# Altium PCB DC_Switch_2.PcbDoc
Units mm, origin at the board's own origin, x right, y up, seen from the top; angles counter-clockwise.
Board outline 74.5 x 95.28 mm, 2 copper layers (Top Layer, Bottom Layer); 24 components, 104 nets, 306 pads, 93 vias.
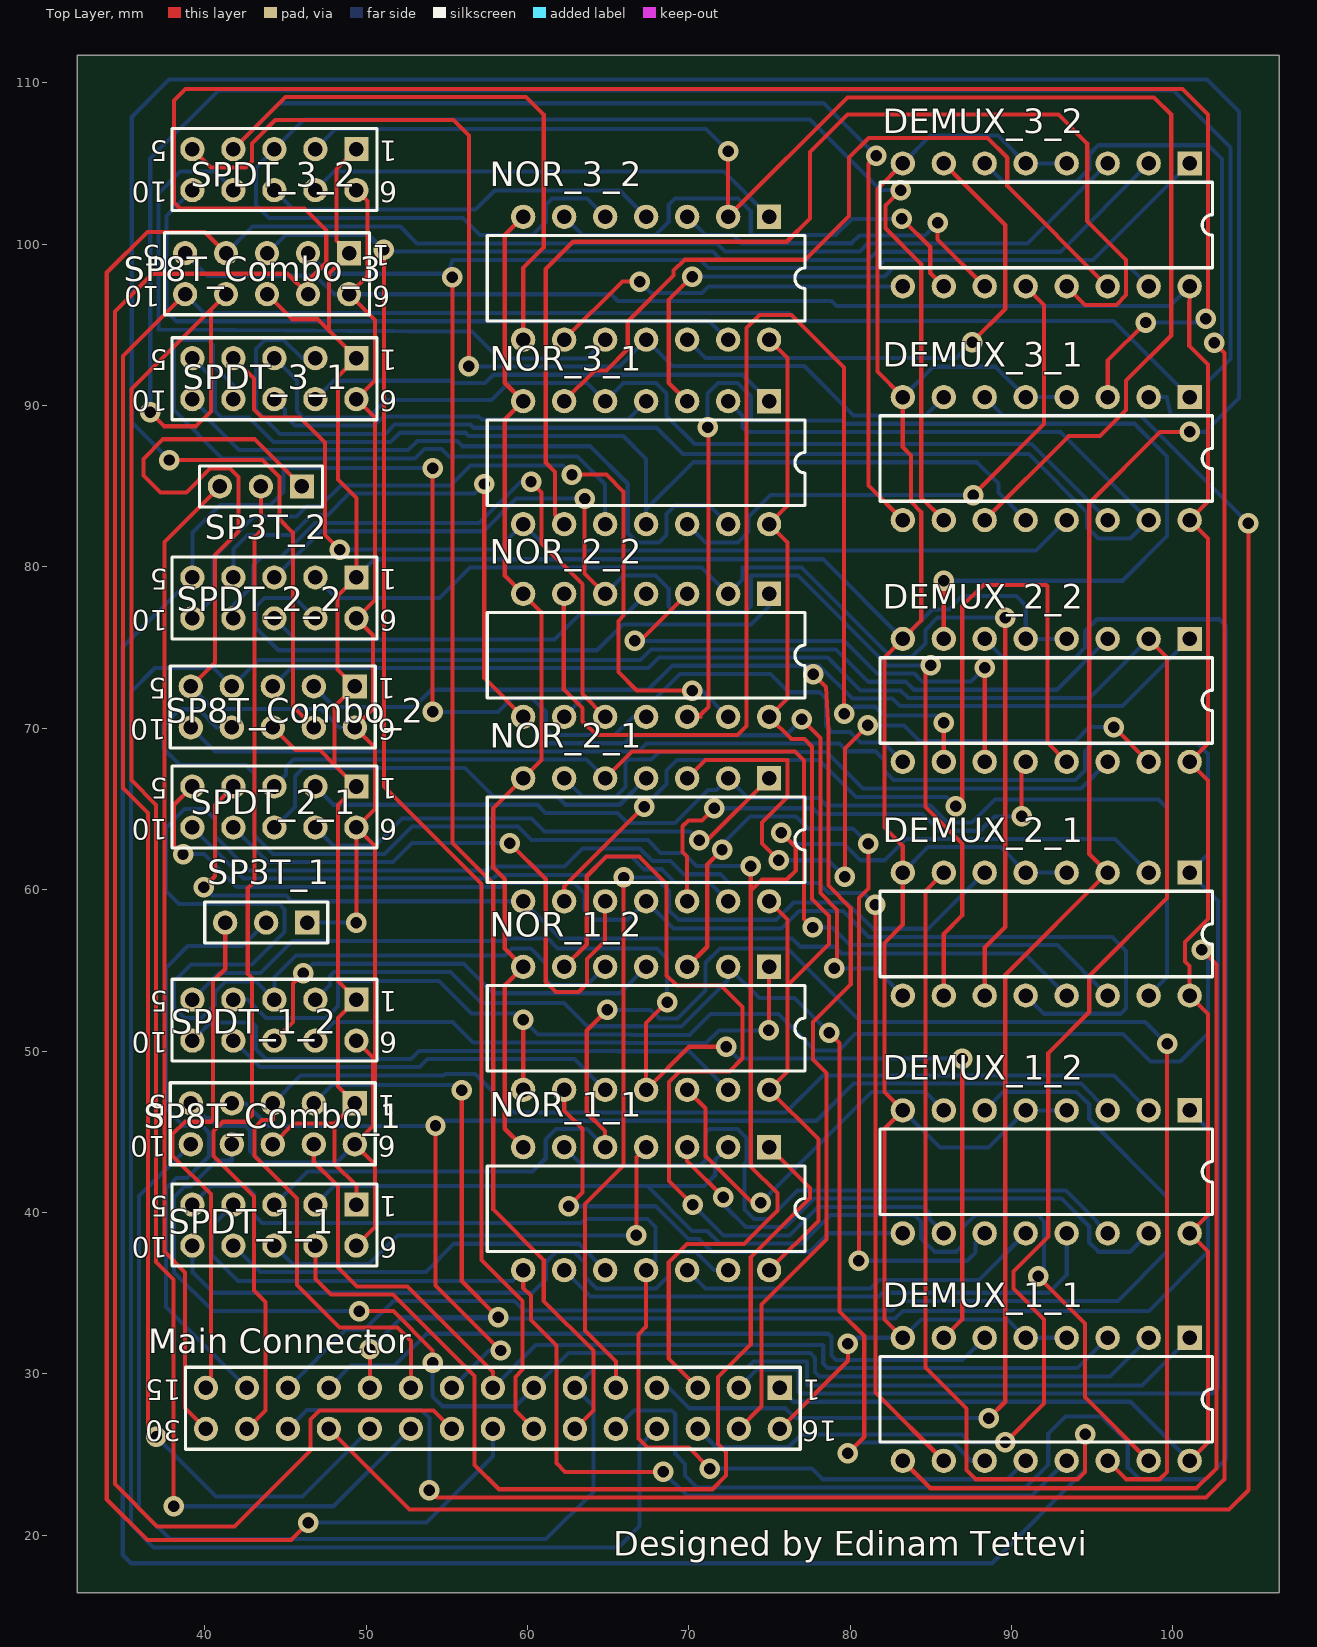
[diagram p0: Top Layer view]
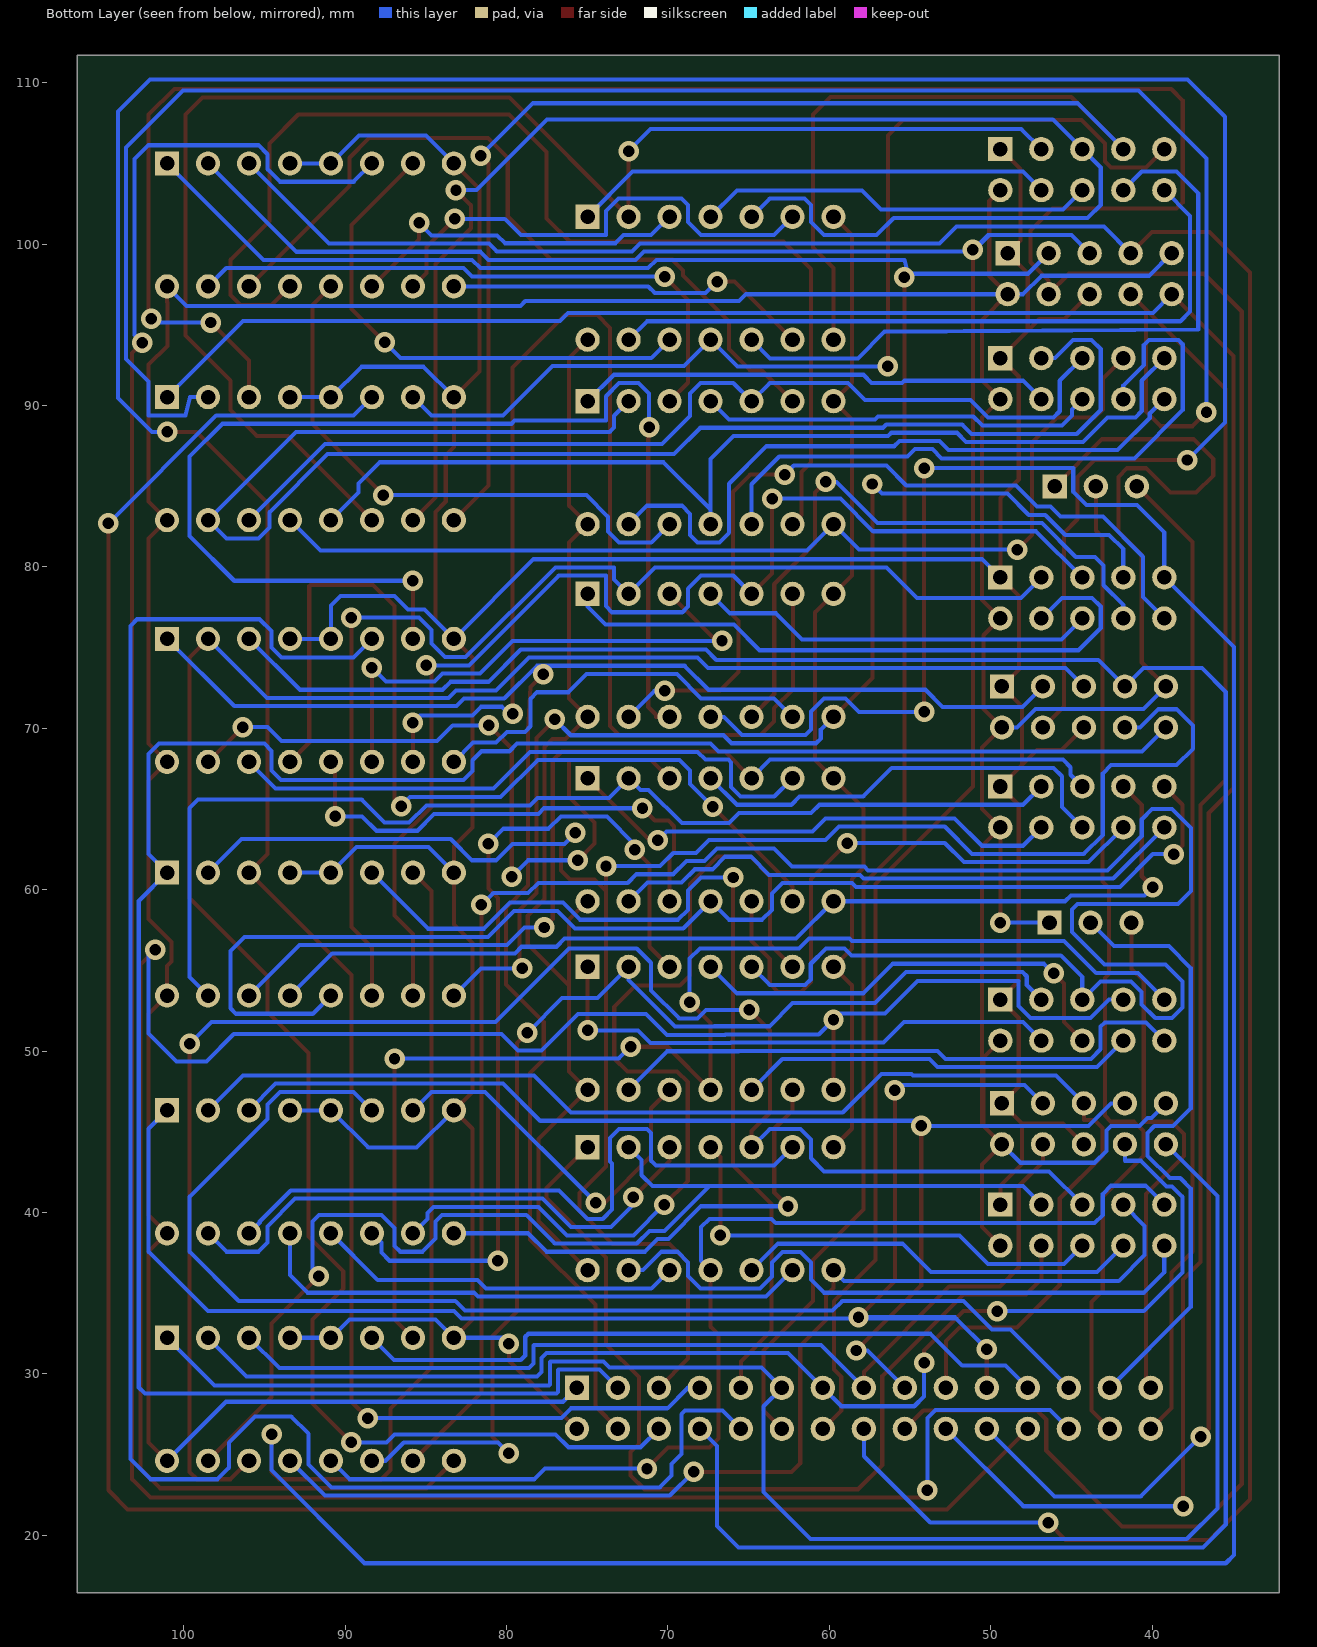
[diagram p1: Bottom Layer view, seen from below]

## Layer stack, top to bottom
Top Solder: solder mask 0.0102, Solder Resist, Dk 3.5
Top Layer: signal copper 0.0356
Dielectric 1: dielectric 0.32, FR-4, Dk 4.8
Bottom Layer: signal copper 0.0356
Bottom Solder: solder mask 0.0102, Solder Resist, Dk 3.5

## Board outline
32.106,16.434 106.604,16.434 106.604,111.709 32.106,111.709

## Design rules (kind name [scope] priority, off if disabled: settings)
Clearance [All] p1: gap=0.254
PolygonConnect [All] p1: connectstyle=Relief reliefconductorwidth=0.254 reliefentries=4 polygonreliefangle="90 Angle" airgapwidth=0.254
RoomDefinition DC_Switch_2 [InComponentClass('DC_Switch_2')] p1: confinementstyle=ConfineIn formatcopy=TRUE lockcomponents=FALSE outline 32.131,16.485 106.553,16.485 106.553,111.735 32.131,111.735
RoutingVias [All] p1: holewidth=0.711 width=1.27 viastyle="Through Hole" minholewidth=0.711 minwidth=1.27 maxholewidth=0.711 maxwidth=1.27
SolderMaskExpansion [All] p1: expansion=0.102
Width [All] p1: maxlimit=0.254 minlimit=0.254 preferedwidth=0.254
30 further rules are at their usual default settings.

## Components (designator, comment, footprint, x,y, rotation, side; value= is the part's Value field where it differs from the comment)
DEMUX_1_1 "CD54HCT238" J016D 92.151,28.423 r180 top
DEMUX_1_2 "CD54HCT238" J016D 92.151,42.52 r180 top
DEMUX_2_1 "CD54HCT238" J016D 92.151,57.252 r180 top
DEMUX_2_2 "CD54HCT238" J016D 92.151,71.73 r180 top
DEMUX_3_1 "CD54HCT238" J016D 92.151,86.716 r180 top
DEMUX_3_2 "CD54HCT238" J016D 92.151,101.194 r180 top
"Main Connector" "Arduino Pins" HDR2X15_CEN 75.641,29.134 r180 top
NOR_1_1 "SN74HC02N" N014 67.361,40.234 r180 top
NOR_1_2 "SN74HC02N" N014 67.361,51.41 r180 top
NOR_2_1 "SN74HC02N" N014 67.361,63.094 r180 top
NOR_2_2 "SN74HC02N" N014 67.361,74.524 r180 top
NOR_3_1 "SN74HC02N" N014 67.361,86.462 r180 top
NOR_3_2 "SN74HC02N" N014 67.361,97.892 r180 top
SP3T_1 "Cntrl" HDR1X3 46.355,57.963 r180 top
SP3T_2 "Cntrl" HDR1X3 46.025,84.988 r180 top
SP8T_Combo_1 "Cntrl" HDR2X5_CEN 49.301,46.761 r180 top
SP8T_Combo_2 "Cntrl" HDR2X5_CEN 49.301,72.593 r180 top
SP8T_Combo_3 "Cntrl" HDR2X5_CEN 48.946,99.441 r180 top
SPDT_1_1 "Cntrl" HDR2X5_CEN 49.403,40.488 r180 top
SPDT_1_2 "Cntrl" HDR2X5_CEN 49.403,53.188 r180 top
SPDT_2_1 "Cntrl" HDR2X5_CEN 49.403,66.396 r180 top
SPDT_2_2 "Cntrl" HDR2X5_CEN 49.403,79.35 r180 top
SPDT_3_1 "Cntrl" HDR2X5_CEN 49.403,92.939 r180 top
SPDT_3_2 "Cntrl" HDR2X5_CEN 49.403,105.893 r180 top

## Footprints (in the part's own frame and the unit in brackets; to place one, negate y for a bottom-side part, rotate by r counter-clockwise, add the part's x,y. Pads: shape width x height; smd on the part's side, far side on the other; paste and mask are expansions set on the pad)
HDR1X3 [mm] "Connector; Header; 3 Position"
  rect 1.5x1.5 hole 0.9: 1(0,0)
  round 1.5 hole 0.9: 2(2.54,0) 3(5.08,0)
  silkscreen extent -1.27,-1.27 6.35,1.27
HDR2X5_CEN [mm] "Connector; Header; 5x2 Position"
  rect 1.5x1.5 hole 0.9: 1(0,0)
  round 1.5 hole 0.9: 2(2.54,0) 3(5.08,0) 4(7.62,0) 5(10.16,0) 6(0,2.54) 7(2.54,2.54) 8(5.08,2.54) 9(7.62,2.54) 10(10.16,2.54)
  silkscreen extent -1.27,-1.27 11.43,3.81
HDR2X15_CEN [mm] "Connector; Header; 15x2 Position"
  rect 1.5x1.5 hole 0.9: 1(0,0)
  round 1.5 hole 0.9: 2(2.54,0) 3(5.08,0) 4(7.62,0) 5(10.16,0) 6(12.7,0) 7(15.24,0) 8(17.78,0) 9(20.32,0) 10(22.86,0) 11(25.4,0) 12(27.94,0) 13(30.48,0) 14(33.02,0) 15(35.56,0) 16(0,2.54) 17(2.54,2.54) 18(5.08,2.54) 19(7.62,2.54) 20(10.16,2.54) 21(12.7,2.54) 22(15.24,2.54) 23(17.78,2.54) 24(20.32,2.54) 25(22.86,2.54) 26(25.4,2.54) 27(27.94,2.54) 28(30.48,2.54) 29(33.02,2.54) 30(35.56,2.54)
  silkscreen extent -1.27,-1.27 36.83,3.81
J016D [mm] "DIP; 16 Leads; Row Spacing 7.62 mm; Pitch 2.54 mm"
  rect 1.5x1.5 hole 0.9: 1(-8.89,-3.81)
  round 1.5 hole 0.9: 2(-6.35,-3.81) 3(-3.81,-3.81) 4(-1.27,-3.81) 5(1.27,-3.81) 6(3.81,-3.81) 7(6.35,-3.81) 8(8.89,-3.81) 9(8.89,3.81) 10(6.35,3.81) 11(3.81,3.81) 12(1.27,3.81) 13(-1.27,3.81) 14(-3.81,3.81) 15(-6.35,3.81) 16(-8.89,3.81)
  silkscreen extent -10.3,-2.65 10.3,2.65
N014 [mm] "DIP; 14 Leads; Row Spacing 7.62 mm; Pitch 2.54 mm"
  rect 1.5x1.5 hole 0.9: 1(-7.62,-3.81)
  round 1.5 hole 0.9: 2(-5.08,-3.81) 3(-2.54,-3.81) 4(0,-3.81) 5(2.54,-3.81) 6(5.08,-3.81) 7(7.62,-3.81) 8(7.62,3.81) 9(5.08,3.81) 10(2.54,3.81) 11(0,3.81) 12(-2.54,3.81) 13(-5.08,3.81) 14(-7.62,3.81)
  silkscreen extent -9.85,-2.65 9.85,2.65

## Part data
DEMUX_1_1 DEMUX_1_2 DEMUX_2_1 DEMUX_2_2 DEMUX_3_1 DEMUX_3_2: library part SN54HC238J, "3-Line to 8-Line Decoder / Demultiplexer"
"Main Connector": library part "Header 15X2A", "Header, 15-Pin, Dual row"
NOR_1_1 NOR_1_2 NOR_2_1 NOR_2_2 NOR_3_1 NOR_3_2: "Quadruple 2-Input Positive-NOR Gate"
SP3T_1 SP3T_2: library part "Header 3", "Header, 3-Pin"
SP8T_Combo_1 SP8T_Combo_2 SP8T_Combo_3 SPDT_1_1 SPDT_1_2 SPDT_2_1 SPDT_2_2 SPDT_3_1 SPDT_3_2: library part "Header 5X2A", "Header, 5-Pin, Dual row"

## Via types
v1: diameter 1.27, hole 0.711, Top Layer to Bottom Layer, 93 vias

## Nets (pads, with @x,y where several pads share a name; then routed paths per layer and width w, separated by ;. In a path a pad name is that pad's centre, name@x,y a point inside that pad or via, vN(x,y) a via of type N, cw(c..) or ccw(c..) an arc to the next point about the centre after c; other vN are vias at no path point)
GND: NOR_1_1.7 NOR_1_2.7 NOR_2_1.7 NOR_2_2.7 NOR_3_1.7 NOR_3_2.7 | length 63
  Top Layer w0.254: NOR_1_1.7 58.598,45.187 58.598,54.077 NOR_1_2.7 58.598,56.363 58.598,60.65 57.887,61.362 57.887,65.049 NOR_2_1.7 60.884,68.047 60.884,77.191 NOR_2_2.7 58.598,79.477 58.598,89.129 NOR_3_1.7 58.598,91.415 58.598,100.559 NOR_3_2.7
NetDEMUX_1_1_1: "Main Connector.6" DEMUX_1_1.1 SP8T_Combo_1.10 | length 102.4
  Bottom Layer w0.254: SP8T_Combo_1.10 35.941,41.021 35.941,21.666 37.851,19.757 61.159,19.757 64.084,22.682 64.084,27.991 62.941,29.134 64.198,30.39 73.62,30.39 74.002,30.773 77.28,30.773 77.318,30.735 77.318,29.33 77.362,29.286 98.095,29.286 DEMUX_1_1.1
NetDEMUX_1_1_2: "Main Connector.7" DEMUX_1_1.2 SP8T_Combo_1.9 | length 79.1
  Top Layer w0.254: v1(49.581,33.884) 51.694,33.884 54.127,31.45 v1(54.127,30.683)
  Bottom Layer w0.254: SP8T_Combo_1.9 41.681,43.202 40.695,43.202 39.111,41.619 38.76,41.619 38.112,40.97 38.112,36.285 40.513,33.884 v1(49.581,33.884) ; v1(54.127,30.683) 54.127,28.6 54.737,27.991 59.258,27.991 60.401,29.134 62.548,31.281 77.534,31.281 77.826,30.989 77.826,30.124 78.105,29.845 96.114,29.845 DEMUX_1_1.2
NetDEMUX_1_1_3: "Main Connector.8" DEMUX_1_1.3 SP8T_Combo_1.7 | length 62.8
  Top Layer w0.254: SP8T_Combo_1.7 46.761,43.129 48.26,41.631 48.26,36.589 49.431,35.418 52.57,35.418 57.861,30.127 57.861,29.134
  Bottom Layer w0.254: 57.861,29.134 60.516,31.789 78.296,31.789 78.334,31.751 78.334,30.632 78.613,30.353 94.082,30.353 DEMUX_1_1.3
NetDEMUX_1_1_4: "Main Connector.16" DEMUX_1_1.4 DEMUX_1_1.5 DEMUX_1_1.8 DEMUX_1_2.4 DEMUX_1_2.5 DEMUX_1_2.8 DEMUX_2_1.4 DEMUX_2_1.5 DEMUX_2_1.8 DEMUX_2_2.4 DEMUX_2_2.5 DEMUX_2_2.8 DEMUX_3_1.4 DEMUX_3_1.5 DEMUX_3_1.8 DEMUX_3_2.4 DEMUX_3_2.5 DEMUX_3_2.8 SP8T_Combo_1.1 SP8T_Combo_1.8 SP8T_Combo_2.1 SP8T_Combo_2.8 SP8T_Combo_3.1 SP8T_Combo_3.8 SPDT_1_1.1 SPDT_1_2.1 SPDT_2_1.1 SPDT_2_2.1 SPDT_3_1.1 SPDT_3_2.1 | length 283.6
  Top Layer w0.254: SP8T_Combo_3.8 45.415,95.352 46.99,95.352 47.701,94.64 ; SP8T_Combo_1.8 45.517,45.517 48.057,45.517 ; SP8T_Combo_2.8 45.618,68.656 47.142,68.656 48.057,67.742 ; SPDT_1_1.1 49.403,41.656 48.057,43.002 48.057,45.517 ; SPDT_3_2.1 48.158,104.648 48.158,100.228 SP8T_Combo_3.1 47.701,98.196 47.701,94.64 ; 75.641,26.594 79.858,30.81 v1(79.858,31.877) ; DEMUX_1_1.8 82.118,33.376 82.118,45.187 DEMUX_1_2.8 82.118,47.473 82.118,56.693 83.261,57.836 DEMUX_2_1.8 83.261,62.719 82.118,63.862 82.118,74.397 DEMUX_2_2.8 84.404,76.683 84.404,83.414 83.769,84.049 83.769,86.919 83.261,87.427 DEMUX_3_1.8 81.686,92.1 81.686,103.429 DEMUX_3_2.8 ; 47.701,94.64 SPDT_3_1.1 48.26,91.796 48.26,85.42 49.403,84.277 SPDT_2_2.1 48.243,78.19 48.243,73.651 SP8T_Combo_2.1 48.057,71.349 48.057,67.742 ; 48.057,45.517 SP8T_Combo_1.1 48.26,47.803 48.26,52.045 SPDT_1_2.1 48.26,54.331 48.26,65.253 SPDT_2_1.1 48.057,67.742
  Bottom Layer w0.254: SPDT_2_2.1 50.534,80.481 78.32,80.481 DEMUX_2_2.8 85.088,77.366 86.116,77.366 86.944,78.195 90.297,78.195 90.881,77.61 DEMUX_2_2.5 DEMUX_2_2.4 ; v1(79.858,31.877) 80.213,32.233 DEMUX_1_1.8 84.404,33.376 89.738,33.376 DEMUX_1_1.5 DEMUX_1_1.4 ; DEMUX_1_2.8 85.573,44.018 88.57,44.018 DEMUX_1_2.5 DEMUX_1_2.4 ; DEMUX_2_1.8 84.836,62.636 89.306,62.636 DEMUX_2_1.5 DEMUX_2_1.4 ; DEMUX_3_1.8 85.141,92.405 89.002,92.405 DEMUX_3_1.5 DEMUX_3_1.4 ; DEMUX_3_2.8 84.988,106.731 89.154,106.731 DEMUX_3_2.5 DEMUX_3_2.4
NetDEMUX_1_1_6: "Main Connector.12" DEMUX_1_1.6 | length 43.9
  Bottom Layer w0.254: 47.701,29.134 49.073,30.505 51.765,30.505 53.74,32.481 78.658,32.481 78.842,32.297 78.842,31.14 79.121,30.861 86.97,30.861 DEMUX_1_1.6
NetDEMUX_1_1_7: DEMUX_1_1.7 NOR_1_2.11 SPDT_1_2.5 | length 78.9
  Top Layer w0.254: v1(68.656,53.035) 67.361,51.74 NOR_1_2.11 70.028,50.267 v1(72.314,50.267) ; DEMUX_1_1.7 86.944,33.376 v1(86.944,49.53)
  Bottom Layer w0.254: SPDT_1_2.5 40.882,54.827 43.461,54.827 45.454,56.82 58.598,56.82 58.75,56.972 61.265,56.972 61.874,56.363 68.021,56.363 68.656,55.728 v1(68.656,53.035) ; v1(72.314,50.267) 73.05,49.53 v1(86.944,49.53)
NetDEMUX_1_1_9: DEMUX_1_1.9 NOR_1_2.8 SPDT_1_2.4 | length 130.3
  Top Layer w0.254: NOR_1_2.8 v1(59.741,51.943) ; DEMUX_1_1.9 84.963,22.911 101.473,22.911 102.692,24.13 102.692,55.372 v1(101.778,56.286)
  Bottom Layer w0.254: SPDT_1_2.4 42.66,53.188 43.803,52.045 47.523,52.045 48.272,52.793 48.272,54.331 54.534,54.331 56.54,52.324 59.36,52.324 v1(59.741,51.943) 60.655,51.029 66.446,51.029 66.472,51.003 70.059,51.003 71.355,52.299 75.565,52.299 77.826,50.038 79.299,50.038 80.31,51.049 96.906,51.049 98.603,49.352 100.457,49.352 102.184,51.079 102.184,55.88 v1(101.778,56.286)
NetDEMUX_1_1_10: DEMUX_1_1.10 NOR_1_2.5 SPDT_1_2.3 | length 140.7
  Top Layer w0.254: v1(81.559,59.055) 81.559,28.854 DEMUX_1_1.10
  Bottom Layer w0.254: NOR_1_2.5 63.69,54.089 61.493,54.089 61.15,54.432 61.15,55.41 60.209,56.351 59.057,56.351 58.623,55.917 45.656,55.917 44.323,54.585 SPDT_1_2.3 43.192,54.319 41.3,54.319 40.652,53.67 40.652,52.895 39.802,52.045 38.76,52.045 38.112,52.693 38.112,54.319 39.156,55.363 42.942,55.363 44.958,57.379 44.958,58.776 44.628,59.106 38.402,59.106 37.592,59.915 37.592,63.83 38.76,64.999 40.005,64.999 40.64,64.364 40.64,63.322 42.762,61.201 57.594,61.201 57.824,61.431 62.302,61.431 63.424,62.553 66.962,62.553 67.742,61.773 68.859,61.773 69.672,60.96 71.958,60.96 72.492,60.427 78.029,60.427 78.664,59.792 80.823,59.792 v1(81.559,59.055)
NetDEMUX_1_1_11: DEMUX_1_1.11 NOR_1_2.2 SPDT_1_2.2 | length 74.6
  Top Layer w0.254: v1(78.715,51.13) 79.35,50.495 79.35,33.858 80.874,32.334 80.874,26.086 v1(79.858,25.07)
  Bottom Layer w0.254: SPDT_1_2.2 47.764,54.089 47.764,54.637 48.025,54.898 55.236,54.898 57.158,52.976 62.276,52.976 63.716,51.537 67.107,51.537 67.132,51.511 69.551,51.511 72.441,54.401 NOR_1_2.2 74.371,53.289 76.556,53.289 v1(78.715,51.13) ; v1(79.858,25.07) 80.531,25.744 86.372,25.744 87.503,24.613 DEMUX_1_1.11
NetDEMUX_1_1_12: DEMUX_1_1.12 NOR_1_1.11 SPDT_1_1.5 | length 70.3
  Top Layer w0.254: NOR_1_1.11 67.361,32.918 66.878,32.436 66.878,25.984 67.437,25.425 70.002,25.425 v1(71.298,24.13)
  Bottom Layer w0.254: SPDT_1_1.5 40.411,41.656 42.545,41.656 43.053,41.148 43.053,39.853 43.561,39.345 63.322,39.345 63.576,39.599 67.437,39.599 67.945,39.091 67.945,37.008 NOR_1_1.11 ; v1(71.298,24.13) 77.622,24.13 78.283,23.47 89.738,23.47 DEMUX_1_1.12
NetDEMUX_1_1_13: DEMUX_1_1.13 NOR_1_1.8 SPDT_1_1.4 | length 70.1
  Top Layer w0.254: NOR_1_1.8 59.741,35.31 60.212,34.839 60.212,33.337 61.798,31.75 61.798,24.46 62.332,23.927 v1(68.415,23.927)
  Bottom Layer w0.254: SPDT_1_1.4 40.462,39.167 40.462,37.363 42.062,35.763 59.08,35.763 NOR_1_1.8 ; v1(68.415,23.927) 69.888,22.454 91.262,22.454 DEMUX_1_1.13
NetDEMUX_1_1_14: DEMUX_1_1.14 NOR_1_1.5 SPDT_1_1.3 | length 104.1
  Top Layer w0.254: NOR_1_1.5 64.821,45.035 63.678,46.178 63.678,51.283 v1(64.948,52.553) ; DEMUX_1_1.14 97.104,23.47 99.187,23.47 99.644,23.927 v1(99.644,50.444)
  Bottom Layer w0.254: SPDT_1_1.3 46.38,42.545 60.325,42.545 61.138,43.358 61.138,44.526 61.786,45.175 63.69,45.175 NOR_1_1.5 ; v1(64.948,52.553) 67.64,52.553 68.174,52.019 69.297,52.019 71.044,53.766 71.044,55.474 71.933,56.363 76.124,56.363 80.684,51.803 98.286,51.803 v1(99.644,50.444)
NetDEMUX_1_1_15: DEMUX_1_1.15 NOR_1_1.2 SPDT_1_1.2 | length 75.5
  Top Layer w0.254: v1(91.643,36.043) 94.564,33.122 94.564,28.55 DEMUX_1_1.15
  Bottom Layer w0.254: SPDT_1_1.2 48.006,41.631 67.437,41.631 ; NOR_1_1.2 71.639,43.242 71.639,42.305 70.965,41.631 67.437,41.631 ; v1(91.643,36.043) 92.024,36.424 92.024,39.446 91.63,39.841 87.757,39.841 86.944,39.028 86.944,37.922 86.589,37.567 85.217,37.567 84.392,38.391 84.392,39.446 83.998,39.841 78.779,39.841 77.013,38.075 71.933,38.075 71.145,38.862 70.206,38.862 67.437,41.631
NetDEMUX_1_1_16: "Main Connector.1" DEMUX_1_1.16 DEMUX_1_2.16 DEMUX_2_1.16 DEMUX_2_2.16 DEMUX_3_1.16 DEMUX_3_2.16 SP3T_1.1 SP3T_2.1 SP8T_Combo_1.5 SP8T_Combo_1.6 SP8T_Combo_2.5 SP8T_Combo_2.6 SP8T_Combo_3.5 SP8T_Combo_3.6 SPDT_1_1.6 SPDT_1_2.6 SPDT_2_1.6 SPDT_2_2.6 SPDT_3_1.6 SPDT_3_2.6 | length 313.9
  Top Layer w0.254: SP8T_Combo_2.5 40.64,74.092 40.64,80.747 42.088,82.194 42.088,85.573 41.541,86.119 40.374,86.119 38.862,84.607 37.272,84.607 36.206,85.674 36.206,86.69 37.431,87.915 43.098,87.915 SP3T_2.1 ; SPDT_1_1.6 50.546,39.091 50.546,42.977 SP8T_Combo_1.6 50.444,45.364 50.444,45.466 ; SPDT_1_2.6 50.444,49.606 50.444,45.466 ; v1(49.403,57.963) SPDT_2_1.6 ; SPDT_3_2.6 50.089,102.667 50.089,98.044 SP8T_Combo_3.6 50.546,95.301 50.546,91.542 SPDT_3_1.6 50.546,89.256 50.546,77.953 SPDT_2_2.6 50.444,75.768 50.444,71.196 SP8T_Combo_2.6 50.546,68.809 50.546,64.999 SPDT_2_1.6 ; DEMUX_1_1.16 102.184,25.756 102.184,37.567 DEMUX_1_2.16 102.184,39.853 102.184,52.299 DEMUX_2_1.16 101.041,55.266 100.758,55.549 100.758,56.763 102.184,58.19 102.184,66.777 DEMUX_2_2.16 102.184,69.063 102.184,81.763 DEMUX_3_1.16 102.184,84.049 102.184,92.534 101.016,93.703 101.016,96.393 101.041,96.418 DEMUX_3_2.16 ; SPDT_2_1.6 50.546,62.713 50.546,45.466 50.444,45.466
  Bottom Layer w0.254: SP8T_Combo_3.5 40.183,98.044 46.862,98.044 48.005,96.901 SP8T_Combo_3.6 65.167,96.901 65.599,96.469 78.842,96.469 79.146,96.164 99.822,96.164 DEMUX_3_2.16 ; SP8T_Combo_1.5 40.042,45.86 40.272,45.86 40.78,45.352 42.545,45.352 42.824,45.073 42.824,43.815 43.561,43.078 48.158,43.078 SP8T_Combo_1.6 ; SP8T_Combo_2.5 40.538,71.196 47.218,71.196 48.361,70.053 SP8T_Combo_2.6 ; SP3T_1.1 v1(49.403,57.963) ; 75.641,29.134 76.505,28.27 97.384,28.27 DEMUX_1_1.16
NetDEMUX_1_2_1: "Main Connector.11" DEMUX_1_2.1 SP8T_Combo_1.2 | length 96.9
  Top Layer w0.254: 50.241,29.134 v1(50.241,31.521) ; v1(55.931,47.574) 55.931,35.763 v1(58.191,33.503)
  Bottom Layer w0.254: SP8T_Combo_1.2 47.892,47.892 55.613,47.892 v1(55.931,47.574) ; v1(50.241,31.521) 52.135,33.416 ; v1(58.191,33.503) 52.222,33.503 52.135,33.416 ; DEMUX_1_2.1 102.184,45.187 102.184,37.567 98.507,33.89 83.267,33.89 82.793,33.416 52.135,33.416
NetDEMUX_1_2_2: "Main Connector.10" DEMUX_1_2.2 SP8T_Combo_1.3 | length 82.5
  Top Layer w0.254: SP8T_Combo_1.3 44.221,45.72 43.561,45.72 43.078,45.237 43.078,43.51 45.72,40.869 45.72,35.509 48.362,32.868 51.943,32.868 52.781,32.029 52.781,29.134
  Bottom Layer w0.254: SP8T_Combo_1.3 45.949,48.489 54.813,48.489 54.915,48.59 56.769,48.59 59.169,46.191 76.01,46.191 78.308,48.489 96.342,48.489 DEMUX_1_2.2
NetDEMUX_1_2_3: "Main Connector.9" DEMUX_1_2.3 SP8T_Combo_1.4 | length 76.2
  Top Layer w0.254: v1(54.305,45.364) 54.305,35.484 v1(58.344,31.445)
  Bottom Layer w0.254: SP8T_Combo_1.4 42.545,46.761 43.942,45.364 v1(54.305,45.364) 54.623,45.683 77.915,45.683 80.213,47.981 94.31,47.981 DEMUX_1_2.3 ; 55.321,29.134 57.633,31.445 v1(58.344,31.445)
NetDEMUX_1_2_6: "Main Connector.13" DEMUX_1_2.6 | length 76.9
  Bottom Layer w0.254: 45.161,29.134 48.766,32.738 49.909,32.738 51.689,34.519 59.196,34.519 59.791,33.924 82.583,33.924 83.178,34.519 96.596,34.519 99.644,37.567 99.644,40.97 94.818,45.796 94.818,46.685 94.031,47.473 89.484,47.473 DEMUX_1_2.6
NetDEMUX_1_2_7: DEMUX_1_2.7 NOR_1_2.12 | length 23.8
  Top Layer w0.254: NOR_1_2.12 71.044,46.457 71.044,43.485 73.914,40.615 v1(74.473,40.615)
  Bottom Layer w0.254: v1(74.473,40.615) 81.331,47.473 84.658,47.473 DEMUX_1_2.7
NetDEMUX_1_2_9: DEMUX_1_2.9 NOR_1_2.9 | length 30.4
  Top Layer w0.254: NOR_1_2.9 62.281,46.318 63.412,45.187 63.412,41.238 v1(62.56,40.386)
  Bottom Layer w0.254: v1(62.56,40.386) 67.945,40.386 69.977,38.354 70.637,38.354 71.425,37.567 77.521,37.567 78.664,38.71 DEMUX_1_2.9
NetDEMUX_1_2_10: DEMUX_1_2.10 NOR_1_2.6 | length 58
  Top Layer w0.254: NOR_1_2.6 63.678,56.617 63.678,60.833 64.897,62.052 66.929,62.052 68.631,60.35 68.631,54.686 69.266,54.051 72.009,54.051 73.33,52.73 73.33,49.555 72.517,48.743 69.43,48.743 68.77,48.082 68.77,41.956 v1(70.238,40.488)
  Bottom Layer w0.254: v1(70.238,40.488) 72.143,38.583 76.251,38.583 78.017,40.349 84.518,40.349 84.912,39.954 84.912,39.599 DEMUX_1_2.10
NetDEMUX_1_2_11: DEMUX_1_2.11 NOR_1_2.3 | length 53.9
  Top Layer w0.254: NOR_1_2.3 71.145,56.464 71.145,61.57 v1(72.06,62.484) ; v1(80.543,37.008) 80.543,59.487 81.128,60.071 v1(81.128,62.84)
  Bottom Layer w0.254: v1(72.06,62.484) 72.06,62.814 73.787,64.541 76.632,64.541 77.394,63.779 80.188,63.779 v1(81.128,62.84) ; v1(80.543,37.008) 87.249,37.008 87.757,37.516 87.757,38.125 DEMUX_1_2.11
NetDEMUX_1_2_12: DEMUX_1_2.12 NOR_1_1.12 | length 22.9
  Bottom Layer w0.254: NOR_1_1.12 71.032,35.293 81.271,35.293 81.792,35.814 87.986,35.814 DEMUX_1_2.12
NetDEMUX_1_2_13: DEMUX_1_2.13 NOR_1_1.9 | length 35
  Bottom Layer w0.254: NOR_1_1.9 63.92,34.785 81.779,34.785 82.021,35.027 92.329,35.027 93.421,36.119 DEMUX_1_2.13
NetDEMUX_1_2_14: DEMUX_1_2.14 NOR_1_1.6 | length 43.1
  Bottom Layer w0.254: NOR_1_1.6 63.424,42.901 70.739,42.901 71.044,43.205 71.044,44.921 71.298,45.175 73.025,45.175 73.584,44.616 73.584,43.155 73.457,43.028 73.457,40.183 74.041,39.599 74.981,39.599 76.747,41.365 93.375,41.365 95.294,39.446 95.294,39.377 DEMUX_1_2.14
NetDEMUX_1_2_15: DEMUX_1_2.15 NOR_1_1.3 | length 34.6
  Top Layer w0.254: NOR_1_1.3 69.901,43.18 v1(72.136,40.945)
  Bottom Layer w0.254: v1(72.136,40.945) 72.136,40.488 73.533,39.091 75.997,39.091 77.763,40.857 93.103,40.857 94.818,39.141 94.818,38.125 95.377,37.567 97.358,37.567 DEMUX_1_2.15
NetDEMUX_2_1_1: "Main Connector.2" DEMUX_2_1.1 SP8T_Combo_2.10 | length 139.3
  Bottom Layer w0.254: SP8T_Combo_2.10 40.628,68.567 66.878,68.567 67.374,69.063 79.35,69.063 79.832,68.58 81.559,68.58 82.118,68.021 82.118,67.347 82.677,66.789 93.967,66.789 94.564,67.386 94.564,68.605 95.009,69.051 101.536,69.051 102.184,68.402 102.184,62.205 DEMUX_2_1.1 102.794,59.309 102.794,29.159 102.413,28.778 76.903,28.778 76.81,28.872 76.81,30.227 76.772,30.265 74.232,30.265 73.101,29.134
NetDEMUX_2_1_2: "Main Connector.3" DEMUX_2_1.2 SP8T_Combo_2.9 | length 119.1
  Top Layer w0.254: 70.561,29.134 68.758,30.937 68.758,36.906 69.901,38.049 73.431,38.049 75.489,40.107 75.489,41.199 73.838,42.85 73.838,59.919 ; v1(73.838,61.468) 73.838,59.919 ; v1(75.737,63.525) 76.632,62.631 76.632,61.189 76.073,60.63 74.549,60.63 73.838,59.919
  Bottom Layer w0.254: SP8T_Combo_2.9 40.742,70.053 39.611,71.184 38.481,71.184 37.465,70.168 37.465,68.732 38.481,67.716 42.545,67.716 43.053,67.208 43.053,63.398 44.235,62.217 51.156,62.217 52.846,63.906 59.411,63.906 60.249,63.068 67.462,63.068 68.25,62.281 69.672,62.281 70.485,61.468 v1(73.838,61.468) ; v1(75.737,63.525) 76.42,62.842 79.626,62.842 80.645,61.824 82.138,61.824 83.459,63.144 96.418,63.144 DEMUX_2_1.2
NetDEMUX_2_1_3: "Main Connector.4" DEMUX_2_1.3 SP8T_Combo_2.7 | length 227.6
  Top Layer w0.254: v1(37.808,86.627) 43.573,86.627 44.628,85.573 44.628,82.956 45.466,82.118 45.466,71.349 SP8T_Combo_2.7 ; v1(88.595,27.254) 89.611,28.27 89.611,54.712 DEMUX_2_1.3 94.818,62.205 94.818,83.972 99.212,88.367 v1(101.041,88.367)
  Bottom Layer w0.254: v1(37.808,86.627) 35.484,88.951 35.484,107.899 37.795,110.211 102.108,110.211 104.089,108.229 104.089,90.475 101.981,88.367 v1(101.041,88.367) ; 68.021,29.134 68.771,29.134 70.041,27.864 75.997,27.864 76.606,27.254 v1(88.595,27.254)
NetDEMUX_2_1_6: "Main Connector.5" DEMUX_2_1.6 | length 60.1
  Top Layer w0.254: 65.481,29.134 65.481,30.767 63.576,32.672 63.576,40.513 65.964,42.901 v1(65.964,60.757)
  Bottom Layer w0.254: v1(65.964,60.757) 67.945,60.757 68.758,59.944 68.758,58.75 69.367,58.141 75.437,58.141 76.504,59.207 79.781,59.207 81.407,57.582 84.861,57.582 DEMUX_2_1.6
NetDEMUX_2_1_7: DEMUX_2_1.7 NOR_2_2.11 SPDT_2_2.5 | length 226.5
  Top Layer w0.254: v1(54.127,71.018) v1(54.127,86.131) ; DEMUX_2_1.7 84.658,59.919 84.658,30.378 87.198,27.838 87.198,24.028 87.757,23.47 94.107,23.47 94.564,23.927 v1(94.564,26.264)
  Bottom Layer w0.254: v1(54.127,71.018) 58.166,71.018 59.004,71.857 60.325,71.857 61.138,71.044 61.138,69.926 61.481,69.583 65.405,69.583 66.536,70.714 NOR_2_2.11 ; v1(54.127,86.131) 44.882,86.131 44.882,84.658 44.069,83.845 40.945,83.845 39.243,82.144 SPDT_2_2.5 34.925,75.032 34.925,18.771 35.433,18.263 88.798,18.263 94.564,24.028 v1(94.564,26.264)
NetDEMUX_2_1_9: DEMUX_2_1.9 NOR_2_2.8 SPDT_2_2.4 | length 74.6
  Top Layer w0.254: v1(57.328,85.141) 57.328,73.127 NOR_2_2.8 ; v1(77.006,70.555) 78.156,69.406 78.156,59.792 79.197,58.75 79.197,55.296 v1(79.019,55.118)
  Bottom Layer w0.254: SPDT_2_2.4 41.783,81.102 42.668,81.987 45.379,81.987 46.619,83.227 47.642,83.227 48.959,84.544 56.731,84.544 v1(57.328,85.141) ; NOR_2_2.8 60.528,69.927 60.528,69.38 60.833,69.075 66.065,69.075 66.561,69.571 76.022,69.571 v1(77.006,70.555) ; v1(79.019,55.118) 81.585,55.118 DEMUX_2_1.9
NetDEMUX_2_1_10: DEMUX_2_1.10 NOR_2_2.5 SPDT_2_2.3 | length 76.3
  Top Layer w0.254: v1(63.551,84.24) 63.551,79.604 NOR_2_2.5 ; v1(84.988,73.914) 84.658,73.584 84.658,65.136 86.944,62.85 86.944,58.395 85.801,57.252 DEMUX_2_1.10
  Bottom Layer w0.254: SPDT_2_2.3 47.185,82.211 57.28,82.211 59.309,84.24 v1(63.551,84.24) ; NOR_2_2.5 65.952,79.465 67.945,79.465 68.758,78.652 68.758,77.546 69.113,77.191 73.457,77.191 73.85,77.584 73.85,79.465 76.764,79.465 82.328,73.901 84.975,73.901 v1(84.988,73.914)
NetDEMUX_2_1_11: DEMUX_2_1.11 NOR_2_2.2 SPDT_2_2.2 | length 73.6
  Top Layer w0.254: DEMUX_2_1.11 88.341,56.413 89.611,57.683 v1(89.611,76.858)
  Bottom Layer w0.254: SPDT_2_2.2 48.133,78.08 54.559,78.08 56.452,79.973 70.802,79.973 NOR_2_2.2 73.342,79.235 73.342,79.973 76.974,79.973 82.538,74.409 83.807,74.409 84.658,75.26 84.658,76.098 85.418,76.858 v1(89.611,76.858)
NetDEMUX_2_1_12: DEMUX_2_1.12 NOR_2_1.11 SPDT_2_1.5 | length 78.8
  Top Layer w0.254: v1(38.659,62.205) 38.112,62.751 38.112,65.265 SPDT_2_1.5
  Bottom Layer w0.254: v1(38.659,62.205) 39.956,62.205 41.988,60.173 58.356,60.173 58.598,60.415 62.902,60.415 63.551,59.766 63.551,58.75 64.16,58.141 66.218,58.141 NOR_2_1.11 69.051,57.594 75.755,57.594 76.843,58.682 79.545,58.682 81.153,57.074 96.241,57.074 97.104,56.21 97.104,52.654 96.761,52.311 92.012,52.311 DEMUX_2_1.12
NetDEMUX_2_1_13: DEMUX_2_1.13 NOR_2_1.8 SPDT_2_1.4 | length 63.3
  Top Layer w0.254: v1(39.954,60.147) 40.64,60.833 40.64,65.253 SPDT_2_1.4
  Bottom Layer w0.254: v1(39.954,60.147) 40.462,59.639 45.034,59.639 45.39,59.284 NOR_2_1.8 62.052,56.972 76.403,56.972 76.911,56.464 79.07,56.464 79.477,56.058 90.805,56.058 DEMUX_2_1.13
NetDEMUX_2_1_14: DEMUX_2_1.14 NOR_2_1.5 SPDT_2_1.3 | length 65.8
  Top Layer w0.254: NOR_2_1.5 66.472,68.555 76.581,68.555 77.14,67.996 77.14,58.191 v1(77.673,57.658)
  Bottom Layer w0.254: SPDT_2_1.3 45.05,67.122 45.05,67.589 45.519,68.059 63.666,68.059 NOR_2_1.5 ; v1(77.673,57.658) 78.892,57.658 79.985,56.566 92.837,56.566 DEMUX_2_1.14
NetDEMUX_2_1_15: DEMUX_2_1.15 NOR_2_1.2 SPDT_2_1.2 | length 68.9
  Bottom Layer w0.254: SPDT_2_1.2 47.994,65.265 60.616,65.265 61.124,64.757 65.586,64.757 66.22,64.123 69.141,64.123 71.193,66.175 71.712,66.175 NOR_2_1.2 73.66,65.684 78.08,65.684 78.537,65.227 84.969,65.227 86.035,64.16 87.554,64.16 88.976,65.583 99.111,65.583 99.644,65.049 99.644,54.585 DEMUX_2_1.15
NetDEMUX_2_2_1: "Main Connector.17" DEMUX_2_2.1 SP8T_Combo_2.2 | length 110.4
  Top Layer w0.254: 73.101,26.594 74.498,27.991 74.498,34.29 78.537,38.329 78.537,48.641 77.699,49.479 77.699,51.799 80.035,54.135 80.035,58.877 78.664,60.249 78.664,69.914 78.511,72.568 v1(77.724,73.355)
  Bottom Layer w0.254: SP8T_Combo_2.2 48.031,71.323 52.983,71.323 54.05,72.39 67.474,72.39 68.961,73.877 v1@77.724,73.877 ; v1(77.724,73.355) v1@77.724,73.877 ; DEMUX_2_2.1 96.876,71.374 83.095,71.374 82.626,71.843 80.144,71.843 78.111,73.877 v1@77.724,73.877
NetDEMUX_2_2_2: "Main Connector.18" DEMUX_2_2.2 SP8T_Combo_2.3 | length 133.6
  Top Layer w0.254: v1(89.611,25.756) 92.024,28.169 92.024,33.376 90.119,35.281 90.119,36.348 92.278,38.507 92.278,49.886 94.818,52.426 94.818,54.661 99.644,59.487 99.644,74.397 DEMUX_2_2.2
  Bottom Layer w0.254: SP8T_Combo_2.3 45.364,73.736 67.513,73.736 68.162,74.385 78.613,74.385 80.647,72.351 83.134,72.351 83.603,71.882 94.844,71.882 DEMUX_2_2.2 ; 70.561,26.594 71.704,25.451 76.175,25.451 76.975,26.252 86.944,26.252 87.44,25.756 v1(89.611,25.756)
NetDEMUX_2_2_3: "Main Connector.19" DEMUX_2_2.3 SP8T_Combo_2.4 | length 155.6
  Bottom Layer w0.254: 68.021,26.594 66.954,25.527 66.954,20.574 65.629,19.249 36.835,19.249 35.433,20.65 35.433,72.263 36.906,73.736 40.538,73.736 SP8T_Combo_2.4 43.332,74.244 67.005,74.244 67.654,74.893 79.121,74.893 81.129,72.885 83.464,72.885 83.959,72.39 92.812,72.39 DEMUX_2_2.3
NetDEMUX_2_2_6: "Main Connector.20" DEMUX_2_2.6 | length 116.9
  Bottom Layer w0.254: 65.481,26.594 66.612,27.725 68.936,27.725 69.164,27.496 69.164,25.019 69.774,24.409 69.774,23.698 70.51,22.962 90.856,22.962 92.278,24.384 92.278,26.289 93.345,27.356 95.58,27.356 97.206,25.73 97.206,24.181 97.917,23.47 102.057,23.47 103.302,24.714 103.302,76.352 102.895,76.759 95.301,76.759 94.564,76.022 94.564,75.006 93.955,74.397 89.484,74.397 DEMUX_2_2.6
NetDEMUX_2_2_7: DEMUX_2_2.7 NOR_2_2.12 | length 76.1
  Top Layer w0.254: NOR_2_2.12 70.739,70.714 70.739,70.841 71.222,71.323 71.222,88.595 v1(71.171,88.646) ; DEMUX_2_2.7 v1(85.801,79.146)
  Bottom Layer w0.254: v1(71.171,88.646) 71.171,90.754 71.819,91.403 73.025,91.403 73.85,90.578 73.85,89.078 79.502,89.078 79.705,88.875 97.612,88.875 99.644,86.843 99.644,81.915 96.876,79.146 v1(85.801,79.146)
NetDEMUX_2_2_9: DEMUX_2_2.9 NOR_2_2.9 | length 25.3
  Bottom Layer w0.254: NOR_2_2.9 63.424,71.857 67.945,71.857 69.444,73.355 75.052,73.355 76.17,72.238 78.105,72.238 78.511,71.831 78.511,70.129 78.867,69.774 79.983,69.774 80.645,69.112 82.069,69.112 DEMUX_2_2.9
NetDEMUX_2_2_10: DEMUX_2_2.10 NOR_2_2.6 | length 82.3
  Top Layer w0.254: NOR_2_2.6 62.255,78.334 62.255,72.415 63.424,71.247 63.424,70.434 64.275,69.583 73.025,69.583 73.584,70.141 73.584,94.818 74.371,95.606 76.378,95.606 79.629,92.354 v1(79.629,70.891) ; DEMUX_2_2.10 v1(85.801,70.358)
  Bottom Layer w0.254: v1(79.629,70.891) 79.731,70.79 80.276,71.335 81.573,71.335 82.118,70.79 85.369,70.79 v1(85.801,70.358)
NetDEMUX_2_2_11: DEMUX_2_2.11 NOR_2_2.3 | length 33.4
  Top Layer w0.254: v1(66.65,75.413) 66.98,75.413 NOR_2_2.3 ; DEMUX_2_2.11 v1(88.341,73.762)
  Bottom Layer w0.254: v1(66.65,75.413) 79.636,75.413 81.656,73.393 83.972,73.393 84.467,72.898 87.478,72.898 v1(88.341,73.762)
NetDEMUX_2_2_12: DEMUX_2_2.12 NOR_2_1.12 | length 30.7
  Top Layer w0.254: NOR_2_1.12 69.901,62.052 69.621,62.332 69.621,63.933 69.977,64.289 70.817,64.289 v1(71.577,65.049) ; v1(90.627,64.541) 90.627,67.666 DEMUX_2_2.12
  Bottom Layer w0.254: v1(71.577,65.049) 77.673,65.049 78.029,64.694 84.486,64.694 85.527,63.652 88.062,63.652 88.951,64.541 v1(90.627,64.541)
NetDEMUX_2_2_13: DEMUX_2_2.13 NOR_2_1.9 | length 59.9
  Top Layer w0.254: NOR_2_1.9 62.281,60.198 v1(67.234,65.151) ; v1(86.538,65.176) 86.944,65.583 86.944,77.572 88.265,78.892 92.151,78.892 92.227,78.816 92.227,69.113 DEMUX_2_2.13
  Bottom Layer w0.254: v1(67.234,65.151) 68.631,66.548 68.631,67.386 69.279,68.035 78.066,68.035 80.366,65.735 85.979,65.735 v1(86.538,65.176)
NetDEMUX_2_2_14: DEMUX_2_2.14 NOR_2_1.6 | length 37.8
  Bottom Layer w0.254: NOR_2_1.6 63.412,65.773 65.493,65.773 66.091,66.37 66.091,67.894 66.255,68.059 67.68,68.059 68.164,68.543 78.537,68.543 80.799,66.281 94.322,66.281 DEMUX_2_2.14
NetDEMUX_2_2_15: DEMUX_2_2.15 NOR_2_1.3 | length 47.5
  Top Layer w0.254: NOR_2_1.3 71.044,68.047 76.124,68.047 76.124,65.735 74.549,64.16 74.549,62.865 v1(75.59,61.824) ; v1(79.68,60.808) 79.68,68.758 v1(81.102,70.18) ; v1(96.342,70.079) DEMUX_2_2.15
  Bottom Layer w0.254: v1(75.59,61.824) 78.664,61.824 v1(79.68,60.808) ; v1(81.102,70.18) 83.337,70.18 84.303,69.215 93.955,69.215 94.818,70.079 v1(96.342,70.079)
NetDEMUX_3_1_1: "Main Connector.26" DEMUX_3_1.1 SP8T_Combo_3.10 | length 154.6
  Top Layer w0.254: v1(36.994,26.111) 36.486,26.619 36.486,64.752 34.95,66.288 34.95,93.066 SP8T_Combo_3.10
  Bottom Layer w0.254: v1(36.994,26.111) 40.703,22.403 46.05,22.403 50.241,26.594 ; SP8T_Combo_3.10 39.954,95.733 76.2,95.733 76.696,95.237 96.33,95.237 DEMUX_3_1.1
NetDEMUX_3_1_2: "Main Connector.25" DEMUX_3_1.2 SP8T_Combo_3.9 | length 213.8
  Top Layer w0.254: v1(36.627,89.586) 37.49,88.722 39.472,88.722 40.386,89.637 40.386,95.961 ; v1(38.075,21.793) 38.075,35.838 36.994,36.918 36.994,65.26 35.458,66.796 35.458,91.034 40.386,95.961 ; SP8T_Combo_3.9 40.386,95.961
  Bottom Layer w0.254: v1(36.627,89.586) 36.627,105.302 40.85,109.525 100.049,109.525 103.581,105.993 103.581,92.879 102.184,91.482 102.184,89.383 99.898,89.383 99.619,90.526 DEMUX_3_1.2 ; v1(38.075,21.793) 47.981,21.793 52.781,26.594
NetDEMUX_3_1_3: "Main Connector.24" DEMUX_3_1.3 SP8T_Combo_3.7 | length 220.7
  Top Layer w0.254: 55.321,26.594 54.178,27.737 47.117,27.737 46.558,27.178 46.558,25.248 41.859,20.549 37.059,20.549 34.442,23.165 34.442,95.834 36.779,98.171 45.136,98.171 SP8T_Combo_3.7 46.406,97.751 47.537,98.882 47.537,100.85 46.177,102.21 38.481,102.21 38.1,102.591 38.1,108.915 38.811,109.626 100.584,109.626 102.184,108.026 102.184,95.529 v1(102.032,95.377) ; DEMUX_3_1.3 95.961,92.786 v1(98.323,95.148)
  Bottom Layer w0.254: v1(98.323,95.148) 101.803,95.148 v1(102.032,95.377)
NetDEMUX_3_1_6: "Main Connector.27" DEMUX_3_1.6 | length 139
  Top Layer w0.254: 47.701,26.594 52.705,21.59 103.48,21.59 104.673,22.784 v1(104.673,82.702)
  Bottom Layer w0.254: DEMUX_3_1.6 89.484,89.383 97.993,89.383 v1(104.673,82.702)
NetDEMUX_3_1_7: DEMUX_3_1.7 NOR_3_2.11 SPDT_3_2.5 | length 66.7
  Top Layer w0.254: SPDT_3_2.5 40.386,104.75 42.545,104.75 42.926,105.131 42.926,106.248 44.374,107.696 55.423,107.696 56.375,106.744 v1(56.375,92.431)
  Bottom Layer w0.254: v1(56.375,92.431) 56.387,92.419 65.698,92.419 NOR_3_2.11 69,92.443 77.155,92.443 80.215,89.383 84.658,89.383 DEMUX_3_1.7
NetDEMUX_3_1_9: DEMUX_3_1.9 NOR_3_2.8 SPDT_3_2.4 | length 101.5
  Top Layer w0.254: SPDT_3_2.4 45.009,109.118 59.919,109.118 61.011,108.026 61.011,99.797 59.741,98.527 NOR_3_2.8 ; v1(81.61,105.486) 81.128,105.004 81.128,85.039 DEMUX_3_1.9
  Bottom Layer w0.254: SPDT_3_2.4 44.628,108.737 78.359,108.737 v1(81.61,105.486)
NetDEMUX_3_1_10: DEMUX_3_1.10 NOR_3_2.5 SPDT_3_2.3 | length 92.1
  Top Layer w0.254: v1(83.134,103.353) 82.194,102.413 82.194,100.99 84.404,98.781 84.404,84.303 DEMUX_3_1.10
  Bottom Layer w0.254: NOR_3_2.5 63.69,102.833 61.532,102.833 61.138,102.438 61.138,101.371 60.325,100.559 57.074,100.559 56.007,101.625 43.993,101.625 43.18,102.438 43.18,104.75 SPDT_3_2.3 46.152,107.721 77.504,107.721 81.873,103.353 v1(83.134,103.353)
NetDEMUX_3_1_11: DEMUX_3_1.11 NOR_3_2.2 SPDT_3_2.2 | length 92.7
  Top Layer w0.254: v1(72.441,105.766) NOR_3_2.2 79.832,109.093 98.831,109.093 99.898,108.026 99.898,94.336 97.104,91.542 97.104,89.738 95.479,88.113 93.548,88.113 DEMUX_3_1.11
  Bottom Layer w0.254: SPDT_3_2.2 48.108,107.137 71.069,107.137 v1(72.441,105.766)
NetDEMUX_3_1_12: DEMUX_3_1.12 NOR_3_1.11 SPDT_3_1.5 | length 62.9
  Bottom Layer w0.254: SPDT_3_1.5 40.64,91.542 40.64,89.662 41.035,89.267 42.753,89.267 44.277,87.744 51.523,87.744 52.095,88.316 56.159,88.316 56.363,88.113 65.938,88.113 67.361,86.69 67.361,83.576 ; NOR_3_1.11 67.361,83.576 ; DEMUX_3_1.12 89.182,84.605 89.182,85.166 87.861,86.487 70.272,86.487 67.361,83.576
NetDEMUX_3_1_13: DEMUX_3_1.13 NOR_3_1.8 SPDT_3_1.4 | length 63.1
  Top Layer w0.254: SPDT_3_1.4 43.053,91.669 43.053,89.764 43.561,89.256 45.898,89.256 47.447,87.706 47.447,81.991 v1(48.362,81.077)
  Bottom Layer w0.254: v1(48.362,81.077) 58.166,81.077 NOR_3_1.8 61.38,81.013 91.528,81.013 DEMUX_3_1.13
NetDEMUX_3_1_14: DEMUX_3_1.14 NOR_3_1.5 SPDT_3_1.3 | length 60.4
  Bottom Layer w0.254: SPDT_3_1.3 45.72,91.542 45.72,89.649 46.101,89.268 50.165,89.268 51.245,90.348 57.785,90.348 58.84,91.403 63.69,91.403 NOR_3_1.5 65.952,91.403 67.982,91.403 68.631,90.754 68.631,89.357 70.371,87.617 91.25,87.617 DEMUX_3_1.14
NetDEMUX_3_1_15: DEMUX_3_1.15 NOR_3_1.2 SPDT_3_1.2 | length 97.8
  Bottom Layer w0.254: SPDT_3_1.2 46.025,92.939 44.894,94.07 43.752,94.07 43.18,93.497 43.18,89.738 44.667,88.252 51.193,88.252 51.765,88.824 56.471,88.824 56.667,88.628 67.996,88.628 69.628,86.995 91.084,86.995 94.691,83.388 94.691,82.448 95.377,81.763 97.358,81.763 DEMUX_3_1.15 93.04,88.367 73.608,88.367 73.342,88.633 73.342,89.371 NOR_3_1.2
NetDEMUX_3_2_1: "Main Connector.21" DEMUX_3_2.1 SP8T_Combo_3.2 | length 134.5
  Top Layer w0.254: v1(55.347,97.942) 55.347,62.89 57.887,60.35 57.887,40.183 61.011,37.059 61.011,34.519 64.084,31.445 64.084,27.737 62.941,26.594
  Bottom Layer w0.254: SP8T_Combo_3.2 47.676,98.171 v1@55.118,98.171 ; v1(55.347,97.942) v1@55.118,98.171 ; DEMUX_3_2.1 95.06,99.023 82.13,99.023 81.622,98.515 71.232,98.515 70.718,99.029 55.347,99.029 v1@55.118,98.171
NetDEMUX_3_2_2: "Main Connector.22" DEMUX_3_2.2 SP8T_Combo_3.3 | length 136.9
  Top Layer w0.254: v1(51.105,99.644) 51.105,66.391 57.15,60.346 57.15,37.053 59.704,34.499 59.704,30.259 59.258,29.814 59.258,27.737 60.401,26.594
  Bottom Layer w0.254: SP8T_Combo_3.3 44.997,100.572 50.077,100.572 ; v1(51.105,99.644) 50.177,100.572 50.077,100.572 ; DEMUX_3_2.2 93.028,99.531 81.622,99.531 81.114,99.023 72.009,99.023 71.494,99.537 51.112,99.537 50.077,100.572
NetDEMUX_3_2_3: "Main Connector.23" DEMUX_3_2.3 SP8T_Combo_3.4 | length 172
  Top Layer w0.254: SP8T_Combo_3.4 40.005,100.762 36.449,100.762 33.934,98.247 33.934,22.225 36.449,19.71 45.364,19.71 v1(46.431,20.777)
  Bottom Layer w0.254: SP8T_Combo_3.4 42.977,101.092 52.122,101.092 53.164,100.051 71.742,100.051 72.238,99.555 80.606,99.555 81.09,100.039 90.996,100.039 DEMUX_3_2.3 ; v1(46.431,20.777) 53.746,20.777 57.861,24.892 57.861,26.594
NetDEMUX_3_2_6: "Main Connector.28" DEMUX_3_2.6 | length 163.1
  Top Layer w0.254: v1(53.924,22.784) 54.381,22.327 102.057,22.327 103.2,23.47 103.2,93.269 v1(102.565,93.904)
  Bottom Layer w0.254: 45.161,26.594 46.33,27.762 53.416,27.762 53.924,27.254 v1(53.924,22.784) ; DEMUX_3_2.6 89.472,103.873 94.043,103.873 94.818,104.648 94.818,105.576 95.377,106.135 102.184,106.135 103.048,105.271 103.048,94.386 v1(102.565,93.904)
NetDEMUX_3_2_7: DEMUX_3_2.7 NOR_3_2.12 | length 32
  Top Layer w0.254: DEMUX_3_2.7 89.611,101.194 89.611,95.987 v1(87.554,93.929)
  Bottom Layer w0.254: NOR_3_2.12 71.032,92.951 86.575,92.951 v1(87.554,93.929)
NetDEMUX_3_2_9: DEMUX_3_2.9 NOR_3_2.9 | length 22.9
  Top Layer w0.254: NOR_3_2.9 65.888,97.688 v1(66.954,97.688)
  Bottom Layer w0.254: v1(66.954,97.688) 67.666,96.977 70.815,96.977 71.222,97.384 DEMUX_3_2.9
NetDEMUX_3_2_10: DEMUX_3_2.10 NOR_3_2.6 | length 30.5
  Top Layer w0.254: v1(83.21,101.575) 84.963,99.822 84.963,98.222 DEMUX_3_2.10
  Bottom Layer w0.254: NOR_3_2.6 63.424,100.559 67.945,100.559 68.758,101.371 68.758,102.438 69.152,102.833 73.062,102.833 73.838,102.057 73.838,100.571 79.106,100.571 80.11,101.575 v1(83.21,101.575)
NetDEMUX_3_2_11: DEMUX_3_2.11 NOR_3_2.3 | length 21.9
  Top Layer w0.254: v1(85.42,101.321) 85.42,100.305 DEMUX_3_2.11
  Bottom Layer w0.254: NOR_3_2.3 71.044,100.559 72.756,100.559 73.252,100.063 80.098,100.063 80.582,100.547 84.646,100.547 v1(85.42,101.321)
NetDEMUX_3_2_12: DEMUX_3_2.12 NOR_3_1.12 | length 35.2
  Top Layer w0.254: v1(87.63,84.455) 92.024,88.849 92.024,96.241 DEMUX_3_2.12
  Bottom Layer w0.254: NOR_3_1.12 71.032,81.521 73.037,81.521 73.711,82.194 73.711,83.109 75.057,84.455 v1(87.63,84.455)
NetDEMUX_3_2_13: DEMUX_3_2.13 NOR_3_1.9 | length 71.7
  Top Layer w0.254: NOR_3_1.9 61.722,83.21 61.722,85.877 61.138,86.462 61.138,98.45 62.84,100.152 76.073,100.152 77.521,101.6 77.521,105.711 79.841,108.031 92.908,108.031 94.691,106.248 94.691,101.448 97.104,99.035 97.104,96.85 96.495,96.241 94.564,96.241 DEMUX_3_2.13
NetDEMUX_3_2_14: DEMUX_3_2.14 NOR_3_1.6 | length 48.6
  Top Layer w0.254: NOR_3_1.6 64.186,92.177 64.897,92.177 66.218,93.497 66.218,95.225 69.063,98.07 69.063,98.374 69.723,99.035 77.216,99.035 79.928,101.747 79.928,105.36 81.153,106.584 88.513,106.584 89.738,105.359 89.738,103.607 DEMUX_3_2.14
NetDEMUX_3_2_15: DEMUX_3_2.15 NOR_3_1.3 | length 37.8
  Top Layer w0.254: NOR_3_1.3 68.758,91.415 68.758,96.545 v1(70.206,97.993)
  Bottom Layer w0.254: v1(70.206,97.993) 82.144,97.993 82.665,98.515 97.37,98.515 DEMUX_3_2.15
"NetMain Connector_14": "Main Connector.14" SP3T_1.2 | length 38.8
  Bottom Layer w0.254: 42.621,29.134 37.604,34.151 37.604,41.478 38.252,42.127 38.901,42.127 40.284,43.51 40.284,44.933 39.865,45.352 38.696,45.352 37.604,46.445 37.604,55.153 38.954,56.503 42.355,56.503 SP3T_1.2
"NetMain Connector_15": "Main Connector.15" SP3T_1.3 | length 32.2
  Top Layer w0.254: 40.081,29.134 40.386,29.439 40.386,41.135 38.01,43.51 38.01,44.856 38.772,45.618 40.386,45.618 40.513,45.745 40.513,54.331 41.275,55.093 SP3T_1.3
"NetMain Connector_29": "Main Connector.29" SP3T_2.2 | length 62.5
  Top Layer w0.254: 42.621,26.594 43.764,27.737 43.764,34.442 43.053,35.154 43.053,40.996 40.538,43.51 40.538,45.034 41.123,45.618 42.545,45.618 42.926,45.999 42.926,54.534 42.672,54.788 42.672,60.096 43.078,60.503 43.078,81.839 43.485,82.245 SP3T_2.2
"NetMain Connector_30": "Main Connector.30" SP3T_2.3 | length 60.9
  Top Layer w0.254: 40.081,26.594 38.786,27.889 38.786,36.283 37.502,37.567 37.502,81.546 SP3T_2.3
NetNOR_1_1_1: NOR_1_1.1 SPDT_1_1.7 | length 60.5
  Top Layer w0.254: SPDT_1_1.7 46.863,35.865 47.818,34.91 51.675,34.91 56.718,29.867 56.718,24.359 58.23,22.847 71.463,22.847 72.314,23.698 72.314,25.146 71.806,25.654 71.806,29.794 73.838,31.826 73.838,37.215 77.521,40.898 77.521,41.504 NOR_1_1.1
NetNOR_1_1_4: NOR_1_1.4 SPDT_1_1.8 | length 29.3
  Top Layer w0.254: v1(66.751,38.583) 66.751,43.434 NOR_1_1.4
  Bottom Layer w0.254: SPDT_1_1.8 45.454,36.817 50.177,36.817 51.943,38.583 v1(66.751,38.583)
NetNOR_1_1_10: NOR_1_1.10 SPDT_1_1.9 | length 25.1
  Bottom Layer w0.254: SPDT_1_1.9 43.422,36.309 53.708,36.309 55.462,38.063 63.182,38.063 NOR_1_1.10
NetNOR_1_1_13: NOR_1_1.13 SPDT_1_1.10 | length 40.4
  Bottom Layer w0.254: SPDT_1_1.10 39.243,36.297 40.513,35.027 60.325,35.027 61.138,35.839 61.138,36.906 61.786,37.555 62.902,37.555 63.551,36.906 63.551,36.029 64.287,35.293 67.982,35.293 68.758,36.068 68.758,36.906 69.418,37.567 70.409,37.567 71.552,36.424 NOR_1_1.13
NetNOR_1_2_1: NOR_1_2.1 SPDT_1_2.7 | length 33.4
  Top Layer w0.254: v1(74.955,51.283) 74.981,51.308 NOR_1_2.1
  Bottom Layer w0.254: SPDT_1_2.7 48.006,51.791 55.372,51.791 56.642,50.521 66.097,50.521 66.122,50.495 71.075,50.495 71.863,51.283 v1(74.955,51.283)
NetNOR_1_2_4: NOR_1_2.4 SPDT_1_2.8 | length 27.8
  Top Layer w0.254: SPDT_1_2.8 45.466,51.791 45.466,54.178 v1(46.101,54.813)
  Bottom Layer w0.254: v1(46.101,54.813) 46.697,55.409 56.071,55.409 57.9,53.581 65.722,53.581 NOR_1_2.4
NetNOR_1_2_10: NOR_1_2.10 SPDT_1_2.9 | length 24.7
  Bottom Layer w0.254: SPDT_1_2.9 43.422,49.009 53.301,49.009 53.797,49.505 62.916,49.505 NOR_1_2.10
NetNOR_1_2_13: NOR_1_2.13 SPDT_1_2.10 | length 36.6
  Bottom Layer w0.254: SPDT_1_2.10 40.374,51.779 42.926,51.779 43.192,51.513 43.192,50.114 43.79,49.517 52.793,49.517 53.289,50.013 65.589,50.013 65.614,49.987 70.053,49.987 NOR_1_2.13
NetNOR_2_1_1: NOR_2_1.1 SPDT_2_1.7 | length 31.4
  Top Layer w0.254: v1(70.637,63.068) 71.145,63.068 NOR_2_1.1
  Bottom Layer w0.254: SPDT_2_1.7 47.994,62.725 50.546,62.725 52.236,64.414 60.249,64.414 61.049,63.615 70.091,63.615 v1(70.637,63.068)
NetNOR_2_1_4: NOR_2_1.4 SPDT_2_1.8 | length 27.3
  Bottom Layer w0.254: SPDT_2_1.8 45.593,65.126 45.593,67.031 46.101,67.539 56.134,67.539 57.9,65.773 61.849,65.773 62.357,65.265 65.722,65.265 NOR_2_1.4
NetNOR_2_1_10: NOR_2_1.10 SPDT_2_1.9 | length 36.6
  Top Layer w0.254: v1(58.903,62.89) 61.138,60.655 61.138,54.292 61.759,53.67 63.182,53.67 63.69,54.178 63.69,55.702 64.821,56.833 NOR_2_1.10
  Bottom Layer w0.254: SPDT_2_1.9 43.93,61.709 51.664,61.709 52.846,62.89 v1(58.903,62.89)
NetNOR_2_1_13: NOR_2_1.13 SPDT_2_1.10 | length 36.2
  Bottom Layer w0.254: SPDT_2_1.10 42.406,60.693 57.872,60.693 58.102,60.923 63.732,60.923 64.854,62.045 66.454,62.045 67.234,61.265 68.338,61.265 69.151,60.452 71.272,60.452 NOR_2_1.13
NetNOR_2_2_1: NOR_2_2.1 SPDT_2_2.7 | length 40
  Bottom Layer w0.254: SPDT_2_2.7 45.593,78.08 43.713,78.08 43.18,77.546 43.18,76.225 44.568,74.838 64.322,74.838 65.913,76.429 73.862,76.429 74.981,77.548 NOR_2_2.1
NetNOR_2_2_4: NOR_2_2.4 SPDT_2_2.8 | length 24.7
  Bottom Layer w0.254: SPDT_2_2.8 45.618,75.514 61.687,75.514 63.303,77.13 66.157,77.13 NOR_2_2.4
NetNOR_2_2_10: NOR_2_2.10 SPDT_2_2.9 | length 39.6
  Top Layer w0.254: v1(60.223,85.268) 60.884,84.607 60.884,81.458 63.412,78.93 63.412,72.123 NOR_2_2.10
  Bottom Layer w0.254: SPDT_2_2.9 41.783,77.648 43.002,78.867 43.002,80.086 43.536,80.62 44.729,80.62 46.829,82.719 57.015,82.719 59.563,85.268 v1(60.223,85.268)
NetNOR_2_2_13: NOR_2_2.13 SPDT_2_2.10 | length 52.1
  Top Layer w0.254: v1(62.763,85.725) 64.897,85.725 65.964,84.658 65.964,76.987 65.634,76.657 65.634,73.482 66.777,72.339 v1(70.206,72.339)
  Bottom Layer w0.254: SPDT_2_2.10 40.564,78.13 40.564,80.632 43.052,83.119 45.685,83.119 46.301,83.735 47.127,83.735 48.443,85.052 55.232,85.052 56.464,86.284 62.205,86.284 v1(62.763,85.725) ; v1(70.206,72.339) 70.815,72.339 NOR_2_2.13
NetNOR_3_1_1: NOR_3_1.1 SPDT_3_1.7 | length 29.5
  Bottom Layer w0.254: SPDT_3_1.7 48.006,91.542 55.347,91.542 55.486,91.403 57.379,91.403 57.887,91.911 73.342,91.911 NOR_3_1.1
NetNOR_3_1_4: NOR_3_1.4 SPDT_3_1.8 | length 24.7
  Bottom Layer w0.254: SPDT_3_1.8 44.972,89.75 44.972,89.381 45.593,88.76 50.507,88.76 51.079,89.332 56.979,89.332 57.175,89.136 66.225,89.136 NOR_3_1.4
NetNOR_3_1_10: NOR_3_1.10 SPDT_3_1.9 | length 42.2
  Bottom Layer w0.254: SPDT_3_1.9 41.783,91.237 40.513,92.507 40.513,93.751 40.195,94.07 38.367,94.07 38.1,93.802 38.1,89.714 41.087,86.728 53.042,86.728 53.614,87.3 54.688,87.3 55.143,86.844 63.103,86.844 64.821,85.126 NOR_3_1.10
NetNOR_3_1_13: NOR_3_1.13 SPDT_3_1.10 | length 41.5
  Bottom Layer w0.254: SPDT_3_1.10 40.144,89.498 40.144,89.23 42.139,87.236 52.603,87.236 53.176,87.808 55.651,87.808 55.977,87.482 63.891,87.482 66.218,85.156 66.218,82.118 66.815,81.521 68.16,81.521 68.631,81.991 68.631,83.287 69.139,83.795 71.298,83.795 NOR_3_1.13
NetNOR_3_2_1: NOR_3_2.1 SPDT_3_2.7 | length 29.7
  Bottom Layer w0.254: SPDT_3_2.7 48.006,104.496 72.187,104.496 NOR_3_2.1
NetNOR_3_2_4: NOR_3_2.4 SPDT_3_2.8 | length 24.7
  Bottom Layer w0.254: SPDT_3_2.8 45.517,102.159 56.794,102.159 57.976,103.341 65.722,103.341 NOR_3_2.4
NetNOR_3_2_10: NOR_3_2.10 SPDT_3_2.9 | length 43
  Bottom Layer w0.254: SPDT_3_2.9 40.64,104.496 38.481,104.496 37.135,103.149 37.135,94.717 56.578,94.578 58.229,92.927 63.666,92.927 NOR_3_2.10
NetNOR_3_2_13: NOR_3_2.13 SPDT_3_2.10 | length 43.7
  Bottom Layer w0.254: SPDT_3_2.10 37.643,101.752 37.643,95.834 38.252,95.225 71.298,95.225 NOR_3_2.13
VCC: NOR_1_1.14 NOR_1_2.14 NOR_2_1.14 NOR_2_2.14 NOR_3_1.14 NOR_3_2.14 | length 71.3
  Top Layer w0.254: NOR_1_1.14 78.029,39.472 78.029,44.552 NOR_1_2.14 76.124,48.743 76.124,54.077 ; NOR_2_1.14 76.124,58.141 76.124,54.077 ; NOR_3_2.14 76.124,92.939 76.124,83.795 NOR_3_1.14 76.124,81.509 76.124,71.857 NOR_2_2.14 76.352,69.342 77.165,69.342 77.648,68.859 77.648,59.426 78.689,58.384 78.689,56.642 76.124,54.077

## Silkscreen, mask and mechanical layers (free items; w line width, h text height)
Top Overlay:
  text "Designed by Edinam Tettevi" at 65.329,18.72 h1.52

## Text inside footprints (layer, text, board x,y; h text height)
"Main Connector": Top Overlay "16" at 79.197,27.102 h1.27 r180; Top Overlay "1" at 78.181,29.642 h1.27 r180; Top Overlay "15" at 38.557,29.642 h1.27 r180; Top Overlay "30" at 38.557,27.102 h1.27 r180
SP8T_Combo_1: Top Overlay "1" at 51.841,47.269 h1.27 r180; Top Overlay "5" at 37.617,47.269 h1.27 r180; Top Overlay "10" at 37.617,44.729 h1.27 r180; Top Overlay "6" at 51.841,44.729 h1.27 r180
SP8T_Combo_2: Top Overlay "1" at 51.841,73.101 h1.27 r180; Top Overlay "5" at 37.617,73.101 h1.27 r180; Top Overlay "10" at 37.617,70.561 h1.27 r180; Top Overlay "6" at 51.841,70.561 h1.27 r180
SP8T_Combo_3: Top Overlay "1" at 51.486,99.949 h1.27 r180; Top Overlay "5" at 37.262,99.949 h1.27 r180; Top Overlay "10" at 37.262,97.409 h1.27 r180; Top Overlay "6" at 51.486,97.409 h1.27 r180
SPDT_1_1: Top Overlay "1" at 51.943,40.996 h1.27 r180; Top Overlay "5" at 37.719,40.996 h1.27 r180; Top Overlay "10" at 37.719,38.456 h1.27 r180; Top Overlay "6" at 51.943,38.456 h1.27 r180
SPDT_1_2: Top Overlay "1" at 51.943,53.696 h1.27 r180; Top Overlay "5" at 37.719,53.696 h1.27 r180; Top Overlay "10" at 37.719,51.156 h1.27 r180; Top Overlay "6" at 51.943,51.156 h1.27 r180
SPDT_2_1: Top Overlay "1" at 51.943,66.904 h1.27 r180; Top Overlay "5" at 37.719,66.904 h1.27 r180; Top Overlay "10" at 37.719,64.364 h1.27 r180; Top Overlay "6" at 51.943,64.364 h1.27 r180
SPDT_2_2: Top Overlay "1" at 51.943,79.858 h1.27 r180; Top Overlay "5" at 37.719,79.858 h1.27 r180; Top Overlay "10" at 37.719,77.318 h1.27 r180; Top Overlay "6" at 51.943,77.318 h1.27 r180
SPDT_3_1: Top Overlay "1" at 51.943,93.447 h1.27 r180; Top Overlay "5" at 37.719,93.447 h1.27 r180; Top Overlay "10" at 37.719,90.907 h1.27 r180; Top Overlay "6" at 51.943,90.907 h1.27 r180
SPDT_3_2: Top Overlay "1" at 51.943,106.401 h1.27 r180; Top Overlay "5" at 37.719,106.401 h1.27 r180; Top Overlay "10" at 37.719,103.861 h1.27 r180; Top Overlay "6" at 51.943,103.861 h1.27 r180